# Altium PCB TaskBoard.PcbDoc
Units mil, origin at the board's own origin, x right, y up, seen from the top; angles counter-clockwise.
Board outline 5000 x 5000 mil, 2 copper layers (Top Layer, Bottom Layer); 22 components, 25 nets, 94 pads, 5 vias.
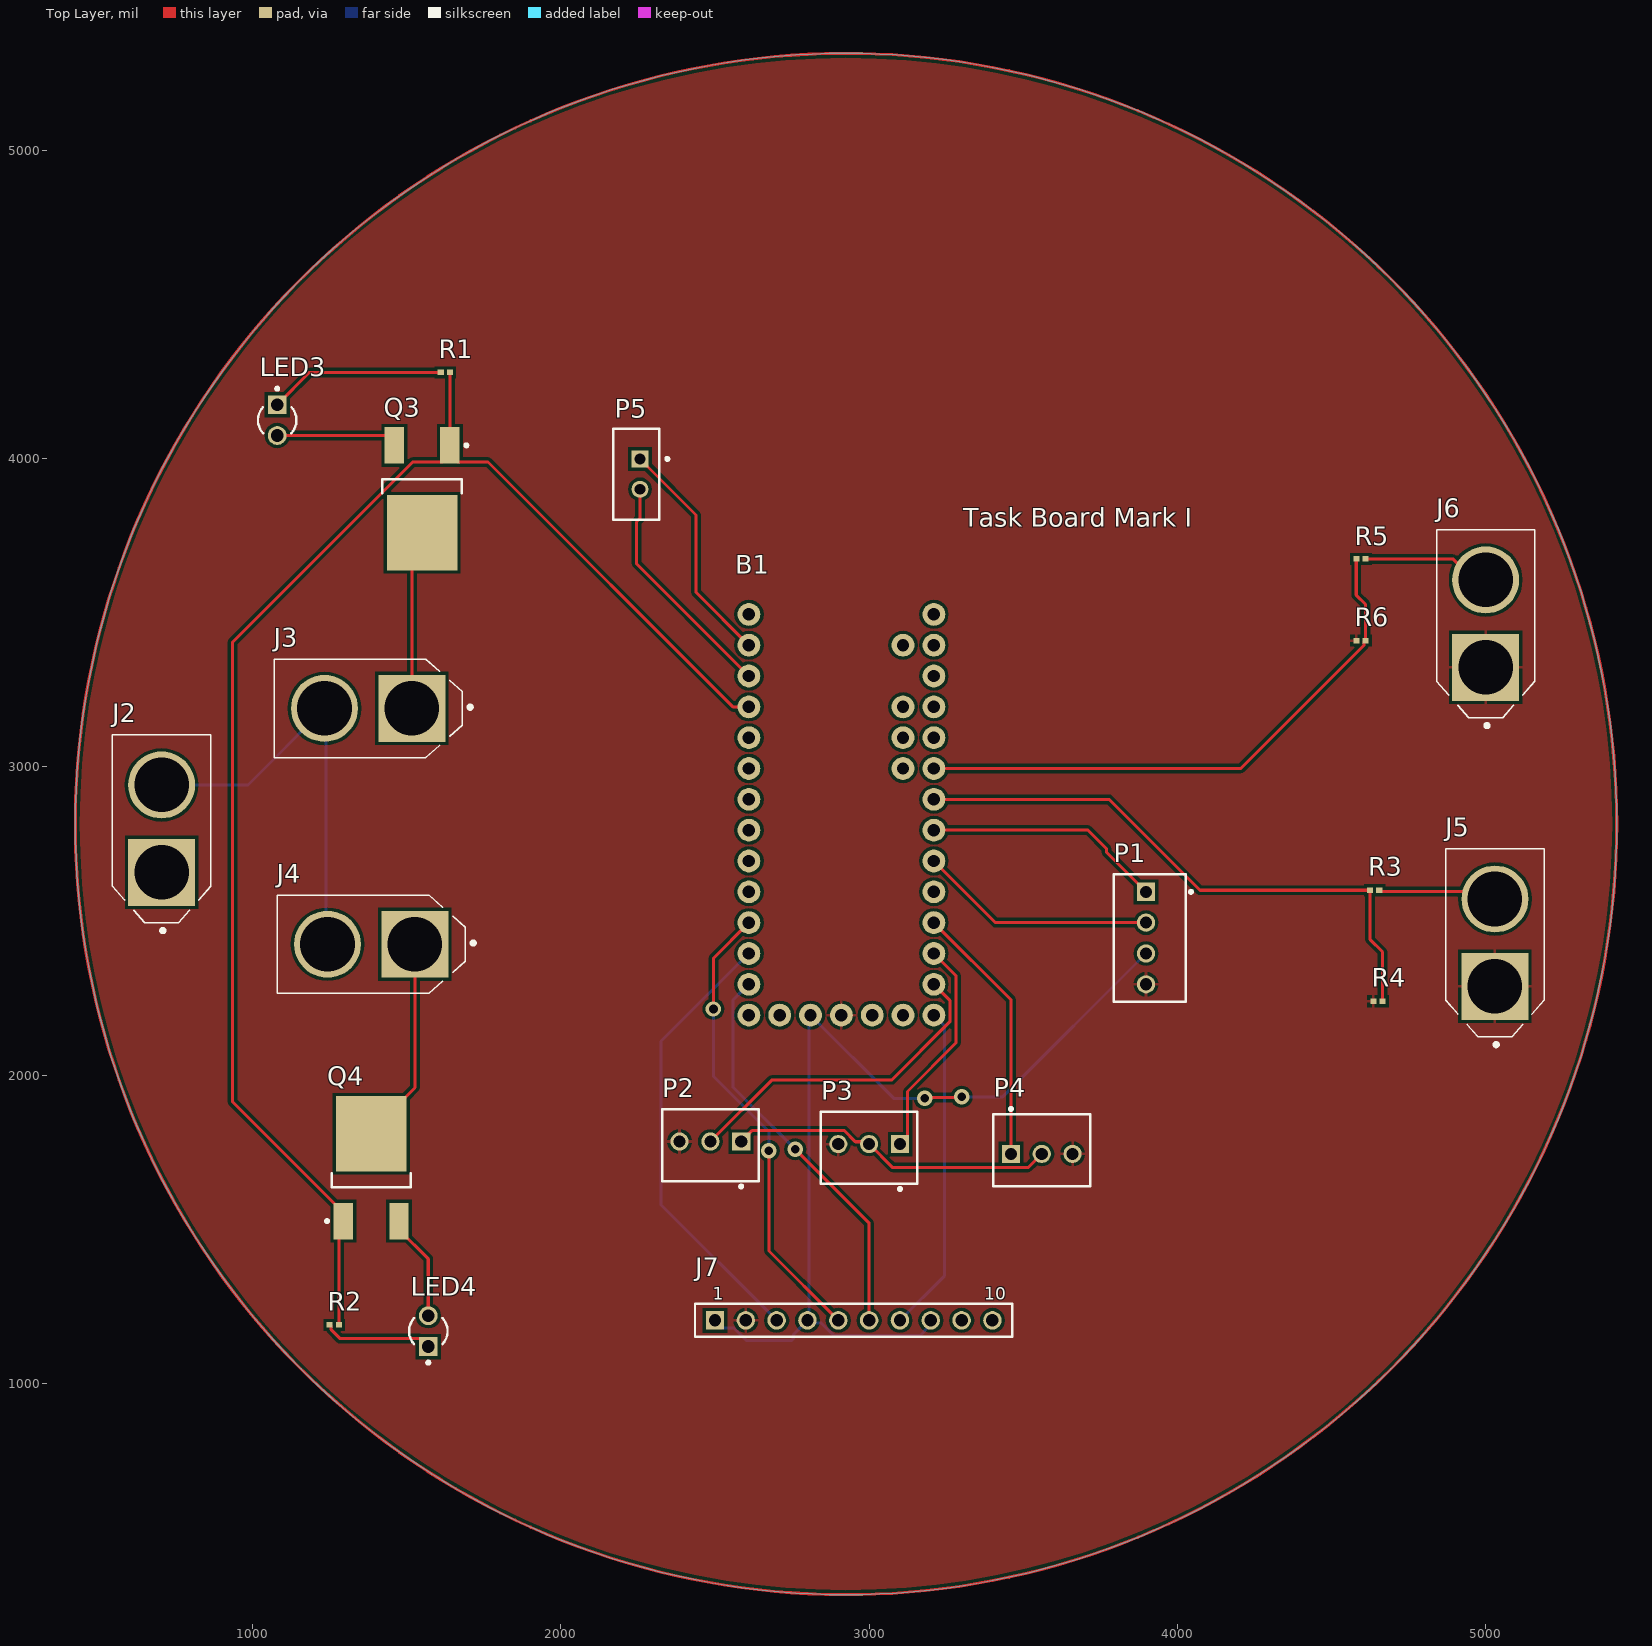
[diagram p0: Top Layer view]
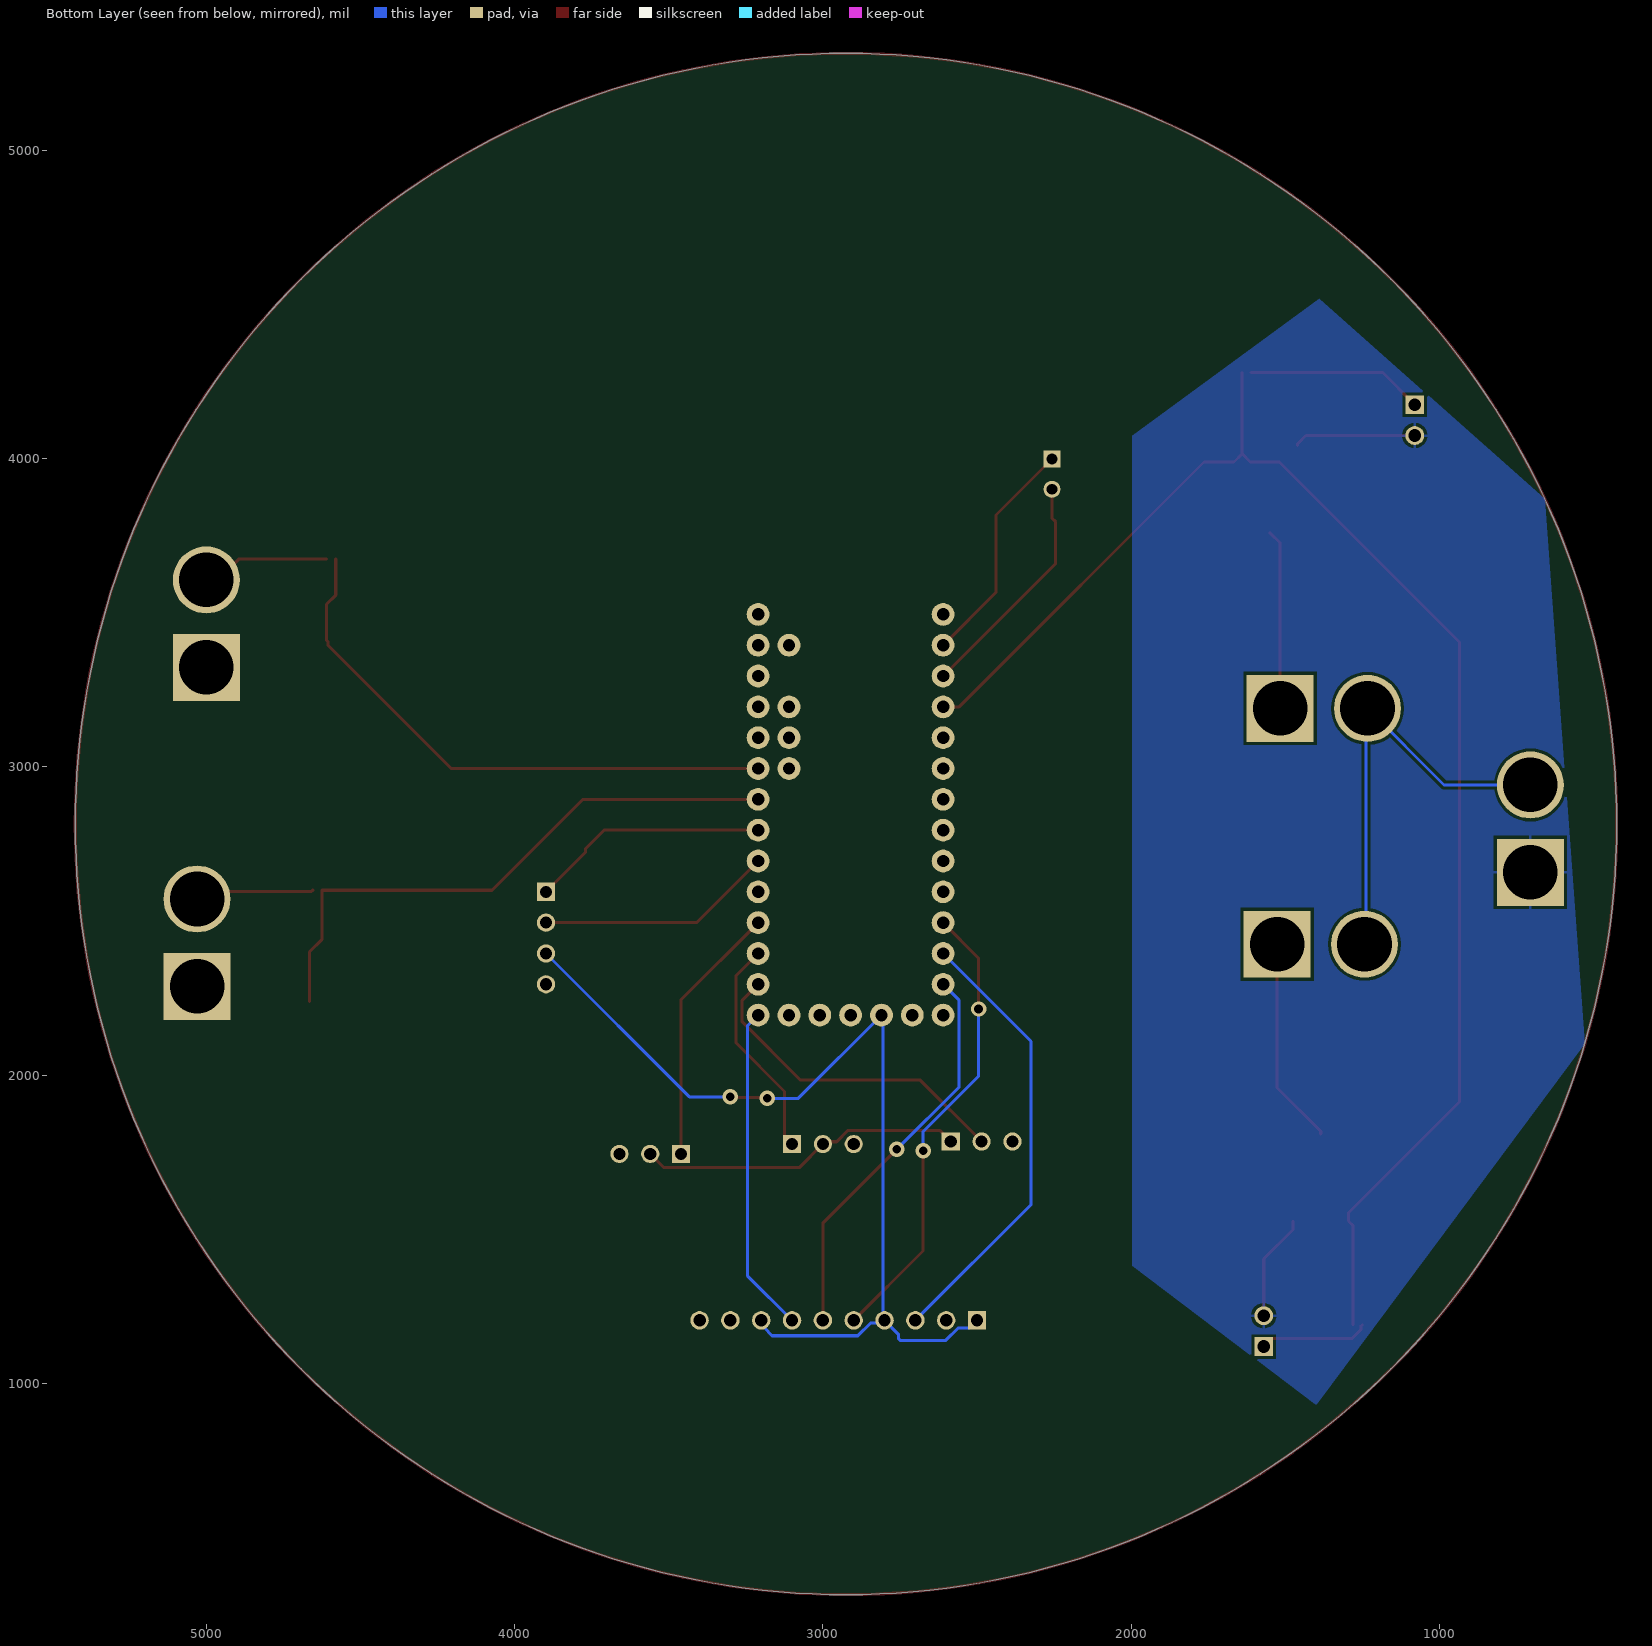
[diagram p1: Bottom Layer view, seen from below]

## Layer stack, top to bottom
Top Solder: solder mask 0.4, Solder Resist, Dk 3.5
Top Layer: signal copper 1.4
s: dielectric 12.6, FR-4, Dk 4.8
Bottom Layer: signal copper 1.4
Bottom Solder: solder mask 0.4, Solder Resist, Dk 3.5

## Board outline
425,2815 ccw(c2925,2815) 2925,315 ccw(c2925,2815) 5425,2815 ccw(c2925,2815) 2925,5315 ccw(c2925,2815)

## Design rules (kind name [scope] priority, off if disabled: settings)
Clearance [All] p1: gap=10 ignorepadtopadclearanceinfootprint=FALSE except(0: Arc-Hole Track-Hole SMDPad-Hole THPad-Hole Via-Hole Fill-Hole Poly-Hole Region-Hole Text-Hole)
PolygonConnect [All] p1: connectstyle=Relief reliefconductorwidth=10 reliefentries=4 polygonreliefangle="90 Angle" airgapwidth=10
RoomDefinition controller_task [InComponentClass('controller_task')] p1: confinementstyle=ConfineIn formatcopy=TRUE lockcomponents=FALSE outline 9255,645 9975,645 9975,2215 9255,2215
RoomDefinition Connectors_task [InComponentClass('Connectors_task')] p2: confinementstyle=ConfineIn formatcopy=TRUE lockcomponents=FALSE outline 5895,3306.73 10135,3306.73 10135,4466.73 5895,4466.73
RoomDefinition Circuits_task [InComponentClass('Circuits_task')] p3: confinementstyle=ConfineIn formatcopy=TRUE lockcomponents=FALSE outline 6539.76,1515 8754.76,1515 8754.76,2175 6539.76,2175
RoutingVias [All] p1: holewidth=28 width=50 viastyle="Through Hole" minholewidth=28 minwidth=50 maxholewidth=28 maxwidth=50
SolderMaskExpansion [All] p1: expansion=4
Width [All] p1: maxlimit=10 minlimit=10 preferedwidth=10
30 further rules are at their usual default settings.

## Classes and differential pairs
component class controller_task: B1
component class Connectors_task: J2 J3 J4 J5 J6 J7 P1 P2 P3 P4 P5
component class Circuits_task: LED3 LED4 Q3 Q4 R1 R2 R3 R4 R5 R6

## Components (designator, comment, footprint, x,y, rotation, side; value= is the part's Value field where it differs from the comment)
B1 "Teensy" TEENSY-3.1 2910,2845 r180 top
J2 "12V" *AMASS_XT60-M 705,2800 r90 top
J3 "Solenoid" *AMASS_XT60-M 1375,3190 r180 top
J4 "Solenoid" *AMASS_XT60-M 1385,2425 r180 top
J5 "Battery1" *AMASS_XT60-M 5030,2430 r90 top
J6 "Battery2" *AMASS_XT60-M 5000,3465 r90 top
J7 "LCD Screen" 61301011821 2950,1205 r0 top
LED3 "HLMP-1719" AVAG-HLMP-1719_V 1080,4125 r270 top
LED4 "HLMP-1719" AVAG-HLMP-1719_V 1570,1170 r90 top
P1 "Pressure Sensor" 61900411121 3910,2445 r90 top
P2 "LED Strip" 61900311121 2485,1773.19 r0 top
P3 "Leak Sensor" 61900311121 3000,1765 r0 top
P4 "Leak Sensor" 61900311121 3560,1756.81 r180 top
P5 "Usart" JST-B2B-EH-A_V 2245,3950 r270 top
Q3 "Mosfet" ONSC-DPAK-3-369AA-01_V 1550,3870 r270 top
Q4 "Mosfet" ONSC-DPAK-3-369AA-01_V 1385,1700 r90 top
R1 "Res" RESC1005X40X25LL05T10 1625.24,4280 r0 top
R2 "Res" RESC1005X40X25LL05T10 1265,1190 r0 top
R3 "Res" RESC1005X40X25LL05T10 4640,2600 r0 top
R4 "Res" RESC1005X40X25LL05T10 4650.24,2240 r0 top
R5 "Res" RESC1005X40X25LL05T10 4595,3675 r0 top
R6 "Res" RESC1005X40X25LL05T10 4595.24,3410 r0 top

## Footprints (in the part's own frame and the unit in brackets; to place one, negate y for a bottom-side part, rotate by r counter-clockwise, add the part's x,y. Pads: shape width x height; smd on the part's side, far side on the other; paste and mask are expansions set on the pad)
61301011821 [mm] "Socket Header, Pitch 2.54 mm, THT, Vertical, single row, 10p"
  rect 1.52x1.52 hole 1.02: 1(-11.43,0)
  round 1.52 hole 1.02: 2(-8.89,0) 3(-6.35,0) 4(-3.81,0) 5(-1.27,0) 6(1.27,0) 7(3.81,0) 8(6.35,0) 9(8.89,0) 10(11.43,0)
  silkscreen extent -13.08,-1.35 13.08,1.35, body extent -12.95,-1.25 12.95,1.25, height 8.55
61900311121 [mm] "2.54mm Male Locking Header, 3p"
  rect 1.5x1.5 hole 1: 1(2.54,0.3)
  round 1.5 hole 1: 2(0,0.3) 3(-2.54,0.3)
  silkscreen extent -3.98,-3.52 3.98,2.98, body extent -3.81,-2.9 3.81,2.9, height 11.53
61900411121 [mm] "2.54mm Male Locking Header, 4p"
  rect 1.5x1.5 hole 1: 1(3.81,0.3)
  round 1.5 hole 1: 2(1.27,0.3) 3(-1.27,0.3) 4(-3.81,0.3)
  silkscreen extent -5.25,-3.52 5.25,2.98, body extent -5.08,-2.9 5.08,2.9, height 11.53
*AMASS_XT60-M [mm]
  rect 5.516x5.516 hole 4.5: 1(-3.6,0)
  round 5.516 hole 4.5: 2(3.6,0)
  silkscreen extent -8.55,-4.05 7.75,4.05
AVAG-HLMP-1719_V [mm] "THD, 2-Leads, Body Dia 3.175mm"
  rect 1.55x1.55 hole 1.05: 1(-1.27,0)
  round 1.55 hole 1.05: 2(1.27,0)
  silkscreen extent -2.72,-1.58 1.08,1.58
JST-B2B-EH-A_V [mm] "THD, 2-Leads, Body 7.5x3.8mm, Pitch 2.5mm"
  rect 1.4x1.4 hole 0.9: 1(-1.25,0.3)
  round 1.4 hole 0.9: 2(1.25,0.3)
  silkscreen extent -3.75,-1.9 3.75,2.68, body extent -3.75,-1.9 3.75,1.9, height 6
ONSC-DPAK-3-369AA-01_V [mm] "DPAK, 3-Leads, Body 6.54x6.095mm, Pitch 2.29mm"
  rect 3x1.6 smd: 1(-4.4,2.29) 3(-4.4,-2.29)
  rect 6.2x5.8 smd: 4(2.8,0)
  silkscreen extent -4.52,-3.27 -0.45,3.77, body extent -1.6,-3.27 4.49,3.27, height 2.47
RESC1005X40X25LL05T10 [mm] "Chip Resistor, 2-Leads, Body 1.00x0.50mm, IPC High Density"
  rect 0.5x0.45 smd: 1(-0.375,0) 2(0.375,0)
  body extent -0.53,-0.27 0.53,0.28, height 0.4
TEENSY-3.1 [mil]
  round 74 / inner round 60 / far side round 74 hole 40: 0(300,-550) 1(300,-450) 2(300,-350) 3(300,-250) 3.3V(100,650) 3V(-300,-450) 4(300,-150) 5(300,-50) 6(300,50) 7(300,150) 8(300,250) 9(300,350) 10(300,450) 11(300,550) 12(300,650) 13(-300,650) 14(-300,550) 15(-300,450) 16(-300,350) 17(-300,250) 18(-300,150) 19(-300,50) 20(-300,-50) 21(-300,-150) 22(-300,-250) 23(-300,-350) A10(-200,-250) A11(-200,-150) A14/DAC(-200,650) AGND(-300,-550) AREF(-200,-350) GND(0,650) GND1(300,-650) PROG(-100,650) VBAT(200,650) VIN(-300,-650) VUSB(-200,-550)

## Part data
B1: library part TEENSY-3.1SILK, Package=TEENSY-3.1, DeviceName=SILK, DeviceSetName=TEENSY-3.1, GateName_1=G$1, LibraryName=SparkFun-Boards, SF_ID=DEV-12646, SymbolName_1=TEENSY-31
J2 J3 J4 J5 J6: library part XT60-M, Package="Package Analog Devices", Availability=Unavailable, MF=AMASS, MP=XT60-M, Price=None, SnapEDA_Link=https://www.snapeda.com/parts/XT60-M/AMASS/view-part/?ref=snap
J7: library part CMP-1502-01332-1, "THT Vertical Socket Header WR-PHD, Pitch 2.54 mm, Single Row, 10 pins", Contact Resistance=20mOhm, Manufacturer="Wurth Elektronik", Operating Temperature=-40to125degC, Package Reference=61301011821, Rated Current=3A, Withstanding Voltage=500VAC, Working Voltage=250VAC, Datasheet URL=https://katalog.we-online.de/em/datasheet/6130xx11821.pdf, Gender=Female, Manufacturer URL=http://www.we-online.de, Mounting Technology=THT, Orientation=Vertical, Packaging=Tray, Part Number=61301011821, Pin Number=10, Pitch=2.54mm, Publisher=WurthElektronik, Row Number=Single
LED3 LED4: library part CMP-2000-06410-1, "Low Current LED Lamp, T-1 (3 mm), 1.8 V, 2 mA, -40 to 100 degC, 2-Pin THD, RoHS, Bulk", Color=Yellow, Dominant Wavelength/Color Temperature=585nm, Manufacturer=AvagoTechnologies, Package=2T-1, Package Description="2-Pin Through Hole Device, Body Dia 3.175 mm", Category=LEDs, Datasheet URL=http://www.avagotech.com/docs/AV02-1557EN, Datasheet Version=07/2014, Intensity=2.1mcd, Lens Appearance=ColoredDiffused, Lens Shape Type=Circular, Manufacturer URL=http://www.avagotech.com/, Mounting=ThroughHole, Mounting Orientation=TopMount, Mounting Technology=ThroughHole, Number of LEDs=1, Package Reference=HLMP-1719, Packaging=Bulk, Pin Count=2, Type=Uni-Color, Viewing Angle=50°
P1: library part CMP-1502-00586-1, "Male Locking Header WR-WTB, THT, Vertical, pitch 2.54 mm, 1 x 4 position", Contact Resistance=20mOhm, Manufacturer="Wurth Elektronik", Operating Temperature=-40to105degC, Package Reference=61900411121, Working Voltage=250VAC, Datasheet URL=https://katalog.we-online.de/em/datasheet/6190xx11121.pdf, Gender=Male, Manufacturer URL=http://www.we-online.de, Mounting Technology=THT, Orientation=Vertical, Packaging=Bag, Part Number=61900411121, Pitch=2.54mm, Position=1x4, Publisher=WurthElektronik
P2 P3 P4: library part CMP-1502-00585-1, "Male Locking Header WR-WTB, THT, Vertical, pitch 2.54 mm, 1 x 3 position", Contact Resistance=20mOhm, Manufacturer="Wurth Elektronik", Operating Temperature=-40to105degC, Package Reference=61900311121, Working Voltage=250VAC, Datasheet URL=https://katalog.we-online.de/em/datasheet/6190xx11121.pdf, Gender=Male, Manufacturer URL=http://www.we-online.de, Mounting Technology=THT, Orientation=Vertical, Packaging=Bag, Part Number=61900311121, Pitch=2.54mm, Position=1x3, Publisher=WurthElektronik
P5: library part CMP-2000-05887-1, "Male Header, Pitch 2.5 mm, 1 x 2 Position, Height 6 mm, Tail Length 3.2 mm, -25 to 85 degC, RoHS, Bulk", Color=Natural, Manufacturer=JST, Package Description="Male Header, Pitch 2.5 mm, 1 x 2 Position, Height 6 mm, Tail Length 3.2 mm", Package Reference=B2B-EH-A, Standard Package=1,000, Category=Connectors,Interconnects, Connector Type=Header,Shrouded, Contact Finish=Tin-Lead, Contact Finish Thickness=-, Contact Mating Length="0.130\"(3.30mm)", Contact Type=MalePin, Datasheet URL=http://media.digikey.com/pdf/Data%20Sheets/JST%20PDFs/EH%20Series.pdf, Datasheet Version=10/2002, Family=RectangularConnectors-Headers,MalePins, Fastening Type=DetentLock, Features=-, Manufacturer URL=http://www.jst.com/home2.html, Mating Products=455-1000-ND-CONNHOUSINGEH2POS2.5MMCRIMP455-2933-ND-CONNRECEPTHR2POS2.5MMBLACK455-2934-ND-CONNRECEPTHR2POS2.5MMWHITE455-1044-ND-CONNRECEPTHR2POS2.5MMWHITE455-1057-ND-CONNRECEPTHR2POS2.5MMBLACK, Mounting Technology=ThroughHole, Mounting Type=ThroughHole, Number of Positions=2, Number of Positions Loaded=All, Number of Rows=1, Other Names=455-1014, Packaging=Bulk, Pitch="0.098\"(2.50mm)", Row Spacing=-, Series=EH, Termination=Press-Fit
Q3 Q4: library part CMP-1058-00321-1, "Power MOSFET, 25 V, 65 A, Single N-Channel, 3-Pin DPAK, Pb-Free, Tape and Reel", Manufacturer="On Semiconductor", Package Type=DPAK-3, PartNumber=NTD4860NT4G, Channel Polarity="N Channel", Ciss Typ (pF)=1308, ComponentLink1Description="Manufacturer URL", ComponentLink1URL=http://www.onsemi.com/, ComponentLink2Description=Datasheet, ComponentLink2URL=http://www.onsemi.cn/pub_link/Collateral/NTD4860N.PDF, ComponentLink3Description="Package Specification", ComponentLink3URL=http://www.onsemi.cn/pub_link/Collateral/369AA.PDF, Configuration=Single, Coss Typ (pF)=342, Crss Typ (pF)=169, DatasheetVersion="Rev. 1", ID Max (A)=65, Mounting Technology="Surface Mount", PackageDescription="3-Pin Flange Mount, Body 6.54 x 6.095 mm, Pitch 2.29 mm", PackageReference=DPAK-3-369AA-01, PackageVersion="Rev. B, 06/2010", Packing="Tape and Reel", Qrr Typ (nC)=3.5, RoHS=Pb-Free, V(BR)DSS Min (V)=25, VGS(th) Max (V)=2.5, VGS Max (V)=20
R1 R2 R3 R4 R5 R6: library part CMP-2002-06514-1, Manufacturer=Multicomp, Part Number=MCMR04X1203FTL

## Via types
v1: diameter 50, hole 28, Top Layer to Bottom Layer, 5 vias

## Nets (pads, with @x,y where several pads share a name; then routed paths per layer and width w, separated by ;. In a path a pad name is that pad's centre, name@x,y a point inside that pad or via, vN(x,y) a via of type N, cw(c..) or ccw(c..) an arc to the next point about the centre after c; other vN are vias at no path point)
NetB1_0: B1.0 P5.1 | length 750.5
  Top Layer w10: P5.1 2438.56,3817.46 2438.56,3566.44 B1.0
NetB1_1: B1.1 P5.2 | length 761.9
  Top Layer w10: P5.2 2256.81,3806.81 2245,3795 2245,3660 B1.1
NetB1_2: B1.2 Q3.1 Q4.1 R1.2 R2.2 | length 4902.6
  Top Layer w10: R2.2 1279.76,1511.69 Q4.1 1294.84,1554.33 935,1914.17 935,3405 1519.17,3989.17 1613.66,3989.17 Q3.1@1640.16,4015.67 ; R1.2 1640,4043.39 Q3.1 Q3.1@1640.16,4015.67 ; B1.2 2558,3195 1763.83,3989.17 1666.65,3989.17 Q3.1@1640.16,4015.67
NetB1_3.3V: B1.3.3V J7.1 J7.4 J7.8 P1.3 | length 3201.2
  Top Layer w10: v1(3180,1925) 3182.5,1927.5 3297.5,1927.5 v1(3300,1930)
  Bottom Layer w10: J7.1 2524.92,1180.08 2561.39,1180.08 2601.47,1140 2749.14,1140 2755,1145.86 2755,1160 J7.4 ; v1(3180,1925) 3080,1925 B1.3.3V 2805,2190 2805,1210 J7.4 ; J7.8 3200,1191.51 3176.32,1167.83 3176.32,1166.32 3165,1155 2886.47,1155 2844.92,1196.55 2808.45,1196.55 J7.4 ; v1(3300,1930) 3433.19,1930 P1.3
NetB1_9: B1.9 J7.5 | length 1505.4
  Top Layer w10: v1(2495,2215) 2495,2380 B1.9 ; v1(2675,1755) 2675,1430 J7.5
  Bottom Layer w10: v1(2495,2215) 2495,1996.72 2675,1816.72 v1(2675,1755)
NetB1_10: B1.10 J7.3 | length 1463.4
  Bottom Layer w10: B1.10 2325,2110 2325,1580 J7.3
NetB1_11: B1.11 J7.6 | length 1294.6
  Top Layer w10: v1(2760,1760) 3000,1520 J7.6
  Bottom Layer w10: B1.11 2558,2243 2558,1962 v1(2760,1760)
NetB1_13: B1.13 J7.7 | length 1064.6
  Bottom Layer w10: J7.7 3245,1350 3245,2160 B1.13
NetB1_14: B1.14 P2.2 | length 1081
  Top Layer w10: P2.2 2683.92,1983.92 3072.46,1983.92 3262,2173.46 3262,2243 B1.14
NetB1_15: B1.15 P3.1 | length 723.4
  Top Layer w10: P3.1 3124.53,1801.34 3124.53,1947.58 3282,2105.05 3282,2323 B1.15
NetB1_16: B1.16 P4.1 | length 853.6
  Top Layer w10: B1.16 3460,2245 P4.1
NetB1_18: B1.18 P1.2 | length 771
  Top Layer w10: B1.18 3410,2495 P1.2
NetB1_19: B1.19 P1.1 | length 778
  Top Layer w10: B1.19 3710,2795 3770,2735 3770,2723.19 P1.1
NetB1_20: B1.20 R3.1 R4.2 | length 1913.9
  Top Layer w10: B1.20 3778.29,2895 4073.29,2600 R3.1 4625.24,2439.88 4665,2400.12 R4.2
NetB1_21: B1.21 R5.1 R6.2 | length 1855.8
  Top Layer w10: B1.21 4205.39,2995 4605.31,3394.93 4605.31,3406.14 4609.17,3410 R6.2 4610,3527.62 4580.24,3557.38 R5.1
NetB1_GND: B1.GND J5.1 J6.1 J7.2 P1.4 P2.3 P3.3 P4.3 R4.1 R6.1
NetJ2_1: J2.1 LED3.2 LED4.2 Q3.3 Q4.3 | length 742.1
  Top Layer w10: LED3.2 1433.35,4075 1459.84,4048.5 Q3.3 ; Q4.3 1475.16,1499.21 1570,1404.37 LED4.2
NetJ2_2: J2.2 J3.2 J4.2 | length 1400.2
  Bottom Layer w10: J2.2 985,2941.73 J3.2 1238.27,3185 1238.27,2430 J4.2
NetJ3_1: J3.1 Q3.4 | length 583.5
  Top Layer w10: J3.1 1516.73,3726.5 Q3.4
NetJ4_1: J4.1 Q4.4 | length 673.5
  Top Layer w10: Q4.4 1385,1818.11 1526.73,1959.84 J4.1
NetJ5_2: J5.2 R3.2 | length 386.9
  Top Layer w10: R3.2 4658.62,2596.14 5005.59,2596.14 J5.2
NetJ6_2: J6.2 R5.2 | length 418.5
  Top Layer w10: R5.2 4893.5,3675 4961.76,3606.73 J6.2
NetLED3_1: LED3.1 R1.1 | length 574
  Top Layer w10: LED3.1 1185,4280 R1.1
NetLED4_1: LED4.1 R2.1 | length 355.3
  Top Layer w10: R2.1 1251.06,1190 1254.92,1186.14 1254.92,1174.93 1284.34,1145.51 1544.49,1145.51 LED4.1
NetP2_1: P2.1 P3.2 P4.2 | length 1058.6
  Top Layer w10: P2.1 2621.34,1821.34 2918.44,1821.34 2955.47,1784.31 2992.5,1784.31 P3.2 3076.34,1700.47 3515.47,1700.47 P4.2
pads on no net: B1.3 B1.3V B1.4 B1.5 B1.6 B1.7 B1.8 B1.12 B1.17 B1.22 B1.23 B1.A10 B1.A11 B1.A14/DAC B1.AGND B1.AREF B1.GND1 B1.PROG B1.VBAT B1.VIN B1.VUSB J7.9 J7.10
copper on no net: | length 15708
  Top Layer w10: 5425,2815 ccw(c2925,2815) 5425,2815

## Polygon pours and split planes (outlines as drawn)
NetJ2_1 on Bottom Layer "Bottom Layer-NetJ2_1" (solid, pour order 16): 658.78,3870.57 1390.5,4518.28 1996.29,4075.04 1996.29,1381.29 1400,930 528.92,2101.7
NetB1_GND on Top Layer "Ground" (solid, pour order 8): 425,2815 ccw(c2925,2815) 2925,315 ccw(c2925,2815) 5425,2815 ccw(c2925,2815) 2925,5315 ccw(c2925,2815)

## Silkscreen, mask and mechanical layers (free items; w line width, h text height)
Top Overlay:
  text "Task Board Mark I" at 3305,3780 h60

## Text inside footprints (layer, text, board x,y; h text height)
J7: Top Overlay "1" at 2492.52,1271.93 h40; Top Overlay "10" at 3373.23,1271.93 h40